# EAGLE board BOB_With_Poly.PCB (EAGLE 7.2.0)
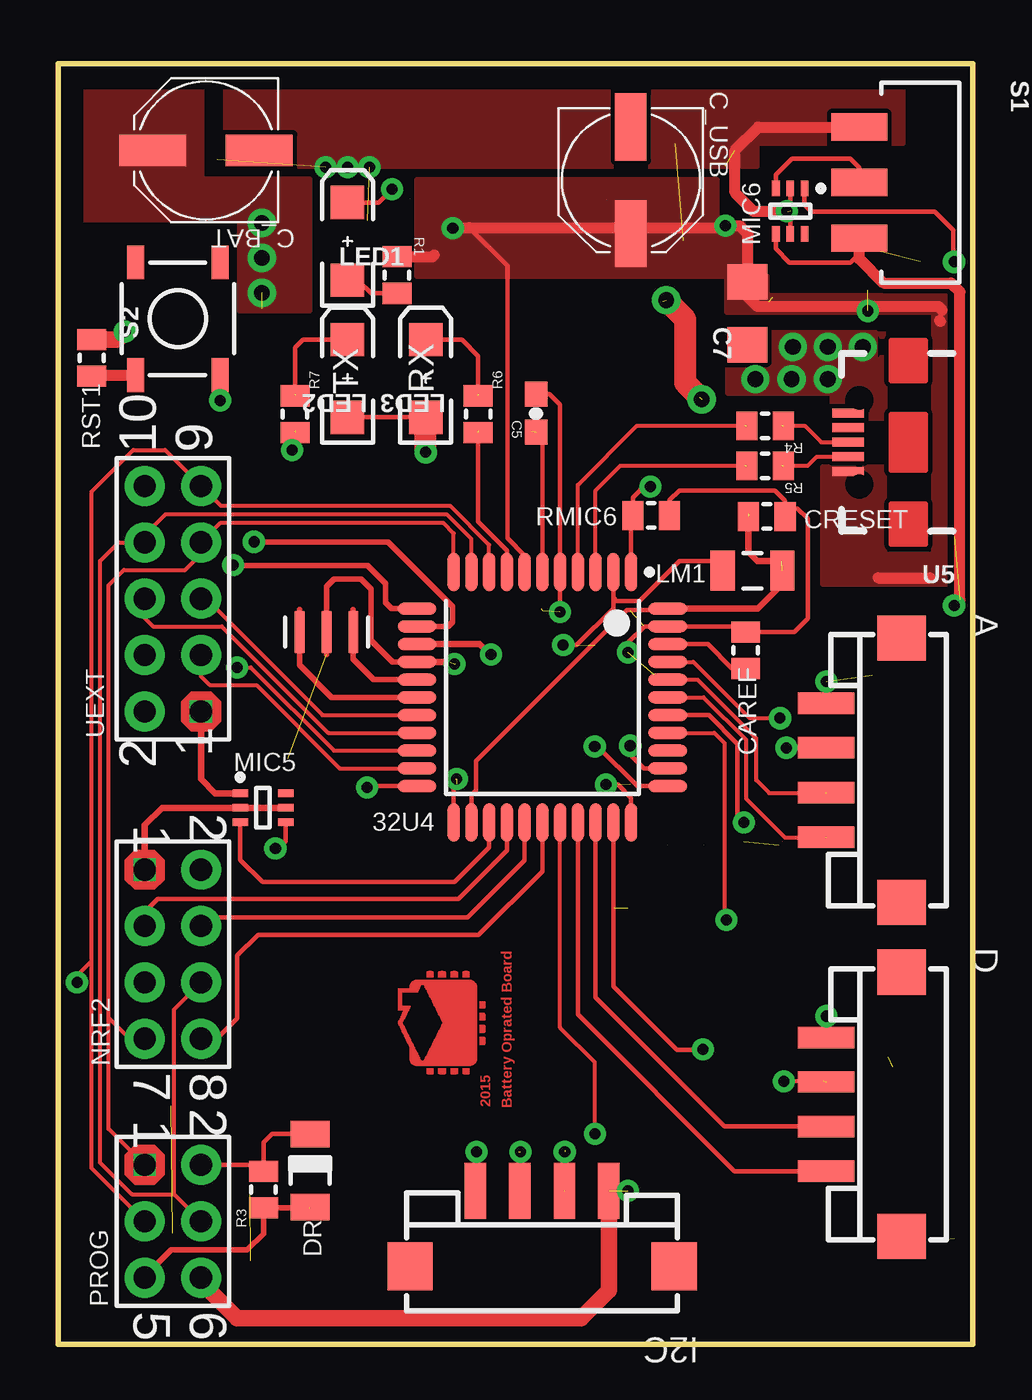
[diagram p0: board, top side]
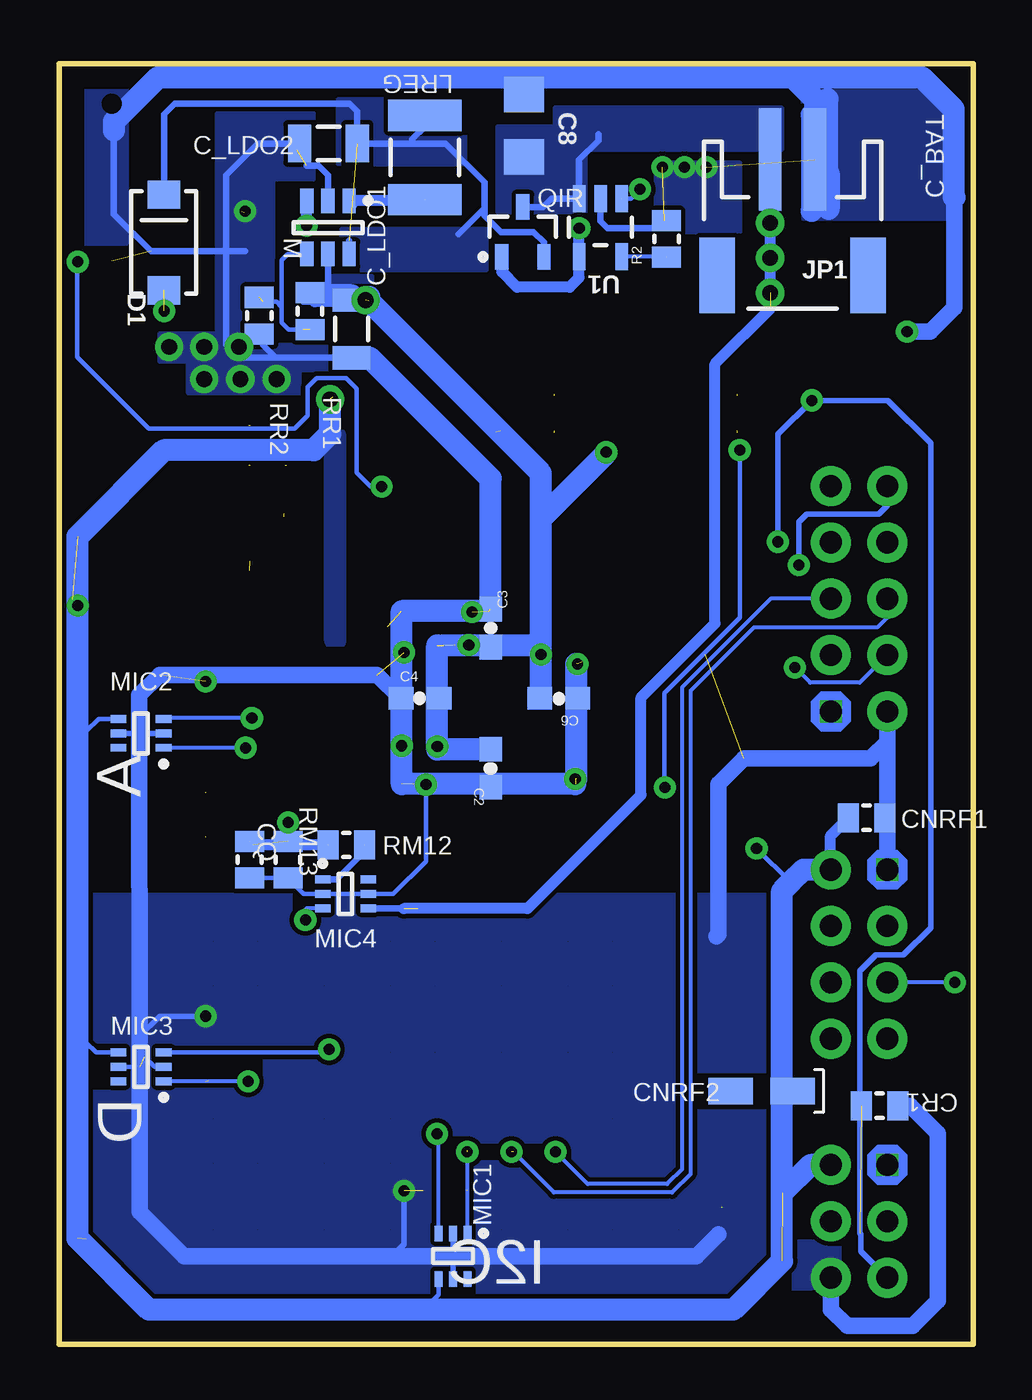
[diagram p1: board, bottom side, seen from below]

Size 41.22 x 57.73 mm. Coordinates in mm from the lower left corner, seen from the top.
Outline: 0,57.73 41.22,57.73 41.22,0 0,0 0,57.73
Copper layers (1*16): Top 0.035mm / dielectric 1.5mm / Bottom 0.035mm
Design rules "BOB_With_Poly": minimum track width 10mil, minimum drill 24mil, track to track 8mil, track to pad 8mil, pad to pad 8mil, via to via 8mil, smd to smd 8mil, copper to edge 40mil, drill to drill 8mil, minimum pad ring 0mil, minimum via ring 0mil, stop-mask expansion 4mil, vias tented up to drill 0mil, thermal gap 10mil

## Footprints (pad centres in the part's own frame; a part is rotated, then mirrored left to right if it is on the bottom)
44ML_N_1PRIMARY = smd 1.75 x 0.55: 1 -5.65,4; 2 -5.65,3.2; 3 -5.65,2.4; 4 -5.65,1.6; 5 -5.65,0.8; 6 -5.65,0; 7 -5.65,-0.8; 8 -5.65,-1.6; 9 -5.65,-2.4; 10 -5.65,-3.2; 11 -5.65,-4; 23 5.65,-4; 24 5.65,-3.2; 25 5.65,-2.4; 26 5.65,-1.6; 27 5.65,-0.8; 28 5.65,0; 29 5.65,0.8; 30 5.65,1.6; 31 5.65,2.4; 32 5.65,3.2; 33 5.65,4 | smd 0.55 x 1.75: 12 -4,-5.65; 13 -3.2,-5.65; 14 -2.4,-5.65; 15 -1.6,-5.65; 16 -0.8,-5.65; 17 0,-5.65; 18 0.8,-5.65; 19 1.6,-5.65; 20 2.4,-5.65; 21 3.2,-5.65; 22 4,-5.65; 34 4,5.65; 35 3.2,5.65; 36 2.4,5.65; 37 1.6,5.65; 38 0.8,5.65; 39 0,5.65; 40 -0.8,5.65; 41 -1.6,5.65; 42 -2.4,5.65; 43 -3.2,5.65; 44 -4,5.65
4P-SMD-2.0_2PRIMARY = smd 0.965 x 2.54: 1 -3,0; 2 -1,0; 3 1.016,0; 4 3.023,0 | smd 2.032 x 2.184: 5 -5.946,3.404; 6 5.969,3.404
0603-CAP_1PRIMARY = smd 1.118 x 1.016: 1 -0.85,0; 2 0.864,0
0603-CAP_2PRIMARY = smd 1.118 x 1.016: 1 -0.85,0; 2 0.864,0
0603-CAP_3PRIMARY = smd 1.118 x 1.016: 1 -0.85,0; 2 0.864,0
0603-CAP_4PRIMARY = smd 1.118 x 1.016: 1 -0.85,0; 2 0.864,0
0603-CAP_5PRIMARY = smd 1.118 x 1.016: 1 -0.85,0; 2 0.864,0
1206_1PRIMARY = smd 1.6 x 1.803: 1 -1.4,0; 2 1.422,0
PANASONIC_D_2PRIMARY = smd 3.023 x 1.422: 1 2.413,0; 2 -2.4,0
SMD_CAP_1206_1PRIMARY = smd 1.05 x 1.7: 1 0,0; 2 2.596,0
PANASONIC_D_1PRIMARY = smd 3.023 x 1.422: 1 2.413,0; 2 -2.4,0
SMD_CAP_0805_1PRIMARY = smd 0.95 x 1.3: 1 0,0; 2 1.65,0
CAPP_1206__3216X18L__SIZE_A_1PRIMARY = smd 1.999 x 1.199: 1 0,0; 2 2.8,0
SMA-DIODE_1PRIMARY = smd 1.27 x 1.473: 1 -2.15,0; 2 2.159,0
LL4148_1PRIMARY = smd 1.2 x 1.75: 1 -1.65,0; 2 1.65,0
4P-SMD-2.0_1PRIMARY = smd 0.965 x 2.54: 1 -3,0; 2 -1,0; 3 1.016,0; 4 3.023,0 | smd 2.032 x 2.184: 5 -5.946,3.404; 6 5.969,3.404
JST-2-SMD_1PRIMARY = smd 1.016 x 4.623: 1 -1,-3.7; 2 1.016,-3.7 | smd 1.6 x 3.404: 3 -3.4,1.524; 4 3.404,1.524
LED_SMD_1206_1PRIMARY = smd 1.5 x 1.5: 1 -1.75,0; 2 1.75,0
INDC3216_1PRIMARY = smd 1.1 x 1.8: 1 -1.35,0; 2 1.35,0
INDC4532_1PRIMARY = smd 1.4 x 3.3: 1 -1.9,0; 2 1.9,0
MCP1640_1PRIMARY = smd 1.1 x 0.6: 1 -1.2,0.95; 2 -1.2,0; 3 -1.2,-0.95; 4 1.2,-0.95; 5 1.2,0; 6 1.2,0.95
MIC94060_1PRIMARY = smd 0.7 x 0.35: 1 -1.025,0.65; 2 -1.025,0; 3 -1.025,-0.65; 4 1.025,-0.65; 5 1.025,0; 6 1.025,0.65
HDR2X4_1PRIMARY = drill 1 pad 0.889 square: 1 0,0 | drill 1 pad 1.8: 2 0,2.54; 3 2.54,0; 4 2.54,2.54; 5 5.08,0; 6 5.08,2.54; 7 7.62,0; 8 7.62,2.54
HDR2X3_1PRIMARY = drill 1 pad 0.889 square: 1 0,0 | drill 1 pad 1.8: 2 0,2.54; 3 2.54,0; 4 2.54,2.54; 5 5.08,0; 6 5.08,2.54
MICRO3_N_1PRIMARY = smd 1.15 x 0.6: 1 -1.125,0.95; 2 -1.125,-0.95; 3 1.125,0
RES_0805__2012X06L__1PRIMARY = smd 0.95 x 1.3: 1 0,0; 2 1.65,0
RES_0805__2012X06L__3PRIMARY = smd 0.95 x 1.3: 1 0,0; 2 1.65,0
RES_0805__2012X06L__2PRIMARY = smd 0.95 x 1.3: 1 0,0; 2 1.65,0
SWITCH-SPDT-SMD_1PRIMARY = drill 0.914 pad 0.914: 1 -3.55,0; 2 3.556,0 | smd 1.219 x 2.515: 3 -2.5,-2.75; 4 0,-2.75; 5 2.515,-2.75
TACTILE_SWITCH_SMD_1PRIMARY = smd 1.524 x 0.762: 1 -2.54,1.905; 2 2.54,1.905; 3 -2.54,-1.905; 4 2.54,-1.905
SOT23-5_1PRIMARY = smd 0.559 x 1.219: 1 -0.95,-1.3; 2 0,-1.3; 3 0.965,-1.3; 4 0.965,1.321; 5 -0.95,1.321
USB-AB-MICRO-SMD_V03_1PRIMARY = drill 0.864 pad 0.864: 1 2.21,-1.9; 2 2.21,1.905 | smd 1.422 x 0.406: 3 2.718,0; 4 2.718,0.66; 5 2.718,-1.3; 6 2.718,-0.65; 7 2.718,1.321
HDR2X5_1PRIMARY = drill 1 pad 0.889 square: 1 0,0 | drill 1 pad 1.8: 2 0,2.54; 3 2.54,0; 4 2.54,2.54; 5 5.08,0; 6 5.08,2.54; 7 7.62,0; 8 7.62,2.54; 9 10.16,0; 10 10.16,2.54
RESONATOR-SMD_1PRIMARY = smd 0.457 x 1.905: 1 -1.2,0; 2 0,0; 3 1.219,0

## Placement (x,y rotation side)
32U4  ATmega32U4-AU  [44ML_N_1PRIMARY]  21.82,29.16 270 top
A  [4P-SMD-2.0_2PRIMARY]  34.62,25.88 270 top
C2  .1uF  [0603-CAP_1PRIMARY]  21.77,25.96 90 bottom
C3  .1uF  [0603-CAP_2PRIMARY]  21.78,32.28 270 bottom
C4  .1uF  [0603-CAP_3PRIMARY]  24.97,29.11 0 bottom
C5  1uF  [0603-CAP_4PRIMARY]  21.54,41.96 90 top
C6  4.7uF  [0603-CAP_5PRIMARY]  18.69,29.11 180 bottom
C7  4.7uF  [1206_1PRIMARY]  31.06,46.46 90 top
C8  4.7uF  [1206_1PRIMARY]  20.27,54.94 270 bottom
C_BAT  [PANASONIC_D_2PRIMARY]  6.65,53.82 180 top
C_LDO1  4.7uF  [SMD_CAP_1206_1PRIMARY]  28.04,47.07 270 bottom
C_LDO2  4.7uF  [SMD_CAP_1206_1PRIMARY]  27.79,54.13 180 bottom
C_USB  [PANASONIC_D_1PRIMARY]  25.81,52.48 270 top
CAREF  100nF  [SMD_CAP_0805_1PRIMARY]  30.99,32.11 270 top
CNRF1  100nF  [SMD_CAP_0805_1PRIMARY]  5.64,23.72 0 bottom
CNRF2  4.7uF  [CAPP_1206__3216X18L__SIZE_A_1PRIMARY]  8.15,11.4 180 bottom
CQ  100nF  [SMD_CAP_0805_1PRIMARY]  32.64,22.66 270 bottom
CR1  4.7nF  [SMD_CAP_0805_1PRIMARY]  5.05,10.74 0 bottom
CRESET  10nF  [SMD_CAP_0805_1PRIMARY]  32.77,37.31 180 top
D  [4P-SMD-2.0_2PRIMARY]  34.62,10.82 270 top
D1  B340A  [SMA-DIODE_1PRIMARY]  36.5,49.66 90 bottom
DR  1N4148  [LL4148_1PRIMARY]  11.35,7.82 90 top
I2C  [4P-SMD-2.0_1PRIMARY]  21.82,6.91 180 top
JP1  JST-2  [JST-2-SMD_1PRIMARY]  8.15,49.71 180 bottom
LED1  RED  [LED_SMD_1206_1PRIMARY]  13.03,49.72 90 top
LED2  RED  [LED_SMD_1206_1PRIMARY]  13.03,43.54 90 top
LED3  RED  [LED_SMD_1206_1PRIMARY]  16.56,43.54 90 top
LM1  Inductor  [INDC3216_1PRIMARY]  31.29,34.87 180 top
LREG  Inductor  [INDC4532_1PRIMARY]  24.74,53.49 270 bottom
M  mcp1640  [MCP1640_1PRIMARY]  29.11,50.34 270 bottom
MIC1  MIC94060  [MIC94060_1PRIMARY]  23.47,3.96 270 bottom
MIC2  MIC94060  [MIC94060_1PRIMARY]  37.54,27.53 180 bottom
MIC3  MIC94060  [MIC94060_1PRIMARY]  37.54,12.5 180 bottom
MIC4  MIC94060  [MIC94060_1PRIMARY]  28.32,20.29 0 bottom
MIC5  MIC94060  [MIC94060_1PRIMARY]  9.22,24.18 0 top
MIC6  MIC94060  [MIC94060_1PRIMARY]  32.99,51.08 270 top
NRF2  Header_4X2  [HDR2X4_1PRIMARY]  3.89,21.39 270 top
PROG  Header_3X2  [HDR2X3_1PRIMARY]  3.89,8.08 270 top
QIR  IRLML6401  [MICRO3_N_1PRIMARY]  20.32,50.14 90 bottom
R1  330  [RES_0805__2012X06L__1PRIMARY]  15.27,49.02 270 top
R2  10k  [RES_0805__2012X06L__1PRIMARY]  13.84,49 90 bottom
R3  4.7k  [RES_0805__2012X06L__1PRIMARY]  9.25,6.15 90 top
R4  22  [RES_0805__2012X06L__1PRIMARY]  32.69,41.4 180 top
R5  22  [RES_0805__2012X06L__1PRIMARY]  32.69,39.6 180 top
R6  330  [RES_0805__2012X06L__1PRIMARY]  18.92,42.75 270 top
R7  330  [RES_0805__2012X06L__1PRIMARY]  10.67,42.75 270 top
RM12  1M  [RES_0805__2012X06L__3PRIMARY]  27.46,22.5 180 bottom
RM13  470K  [RES_0805__2012X06L__2PRIMARY]  30.91,22.66 270 bottom
RMIC6  330  [RES_0805__2012X06L__1PRIMARY]  25.91,37.36 0 top
RR1  976  [RES_0805__2012X06L__1PRIMARY]  29.92,45.75 90 bottom
RR2  562  [RES_0805__2012X06L__1PRIMARY]  32.21,45.54 90 bottom
RST1  330  [RES_0805__2012X06L__1PRIMARY]  1.5,45.29 270 top
S1  [SWITCH-SPDT-SMD_1PRIMARY]  38.86,52.37 270 top
S2  !RESET  [TACTILE_SWITCH_SMD_1PRIMARY]  5.38,46.23 90 top
U1  MCP73831  [SOT23-5_1PRIMARY]  16.81,50.35 180 bottom
U5  USB-ABCONN-11794  [USB-AB-MICRO-SMD_V03_1PRIMARY]  38.33,40.67 180 top
UEXT  Header_5X2  [HDR2X5_1PRIMARY]  6.43,28.52 90 top
Y1  8MHz  [RESONATOR-SMD_1PRIMARY]  12.09,32.11 180 top

## Library data of the parts
32U4 A C2-C8 C_BAT C_LDO1 C_LDO2 C_USB CAREF CNRF1 CNRF2 CQ CR1 CRESET D D1 DR I2C JP1 LED1-LED3 LM1 LREG M MIC1-MIC6 NRF2 PROG QIR R1-R7 RM12 RM13 RMIC6 RR1 RR2 RST1 S1 S2 U1 U5 UEXT Y1 = BOB_With_Poly

## Nets
3.3V: NRF2.2 PROG.2
5V: 32U4.7 C7.2 C_USB.1 D1.1 R1.1 U1.4 U5.7
A0: 32U4.36
A1: 32U4.37
A2: 32U4.38 CQ.1 RM12.2 RM13.1
A3: 32U4.39 A.4
A4: 32U4.40 A.3
A5: 32U4.41
CE1NRF: 32U4.26 NRF2.3
CSN1NRF: 32U4.27 NRF2.4
D0: 32U4.20 UEXT.4
D1: 32U4.21 UEXT.3
D2: 32U4.19 I2C.3 UEXT.6
D3: 32U4.18 I2C.4 UEXT.5
D5: 32U4.31 D.3
D8: 32U4.28 NRF2.8
D9: 32U4.29
D10: 32U4.30 D.4
D11: 32U4.12 UEXT.10
D13: 32U4.32
D14: 32U4.8 R6.2
D15: 32U4.9 NRF2.5 PROG.3 UEXT.9
D16: 32U4.10 NRF2.6 PROG.4 UEXT.8
D17: 32U4.11 NRF2.7 PROG.1 UEXT.7
D+: 32U4.4 R4.2
D-: 32U4.3 R5.2
GND: NRF2.1 PROG.6 S1.1 S1.2 UEXT.2 Y1.2
NET32U4_6: 32U4.6 C5.1
NET32U4_16: 32U4.16 Y1.1
NET32U4_17: 32U4.17 Y1.3
NET32U4_24: 32U4.24 32U4.44 CRESET.2 LM1.1
NET32U4_42: 32U4.42 CAREF.2
NETA_2: A.2
NETC_LDO2_1: D1.2
NETD_2: D.2
NETI2C_2: I2C.2
NETLED1_1: LED1.1 R1.2
NETLED1_2: LED1.2 U1.1
NETLED2_2: LED2.2 R7.1
NETLED3_2: LED3.2 R6.1
NETLREG_2: LREG.2 M.1
NETM_4: M.4 RR1.1 RR2.2
NETMIC4_1: RM12.1
NETR2_1: R2.1 U1.5
NETR4_1: R4.1 U5.3
NETR5_1: R5.1 U5.4
NETRST1_2: RST1.2 S2.1
RESET: 32U4.13 CR1.1 DR.1 PROG.5 R3.1 S2.3
TX_LED: 32U4.22 R7.2
UEXT_POWER: UEXT.1
V_BATT: C8.2 C_BAT.1 JP1.2 U1.3

## Tracks (layer width: path | path; a pad name or v marks a point on that pad's centre or on a via)
3.3V  (via drill 0.5 pad 1, 0.71 pad 1.27)  (7 unrouted)
  Top 0.2: 36.11,49.17 35.71,48.77 32.97,48.77 32.34,49.39 32.34,50.05 | 13.03,41.79 16.56,41.79 | v9.78,22.35 9.93,22.35 10.25,22.67 10.25,23.53 | 11.35,9.47 9.63,9.47 9.25,9.09 9.25,7.86 9.03,8.08 PROG.2 | 27.47,25.16 26.1,25.16 24.31,26.95 v24.18,26.95 | 25.02,33.66 25.17,33.5 26.19,33.5 27.99,35.31 29.92,35.31 | 25.02,33.66 25.02,34.81 | v22.76,31.52 23.37,31.52 25.02,33.17 25.02,33.66
  Top 0.3: 16.17,31.56 18.99,31.56 19.51,31.04 v19.51,31.09
  Top 0.5: v40.39,33.3 40.65,33.56 40.65,47.44 40.25,47.84 37.2,47.84 36.11,48.93 36.11,49.17 36.11,49.86
  Top 1: v16.56,40.21 16.56,41.79 | 28.91,42.7 28.27,43.33 28.27,46.2 v27.41,47.07
  Bottom 0.2: 8.26,20.8 8.26,20.83 v9.78,22.35 | 24.79,1.55 24.12,2.22 24.12,2.94 | 40.01,13.59 40.01,4.72 38.22,2.94 | 40.01,13.59 40.01,27.64 39.46,28.18 38.57,28.18 | 38.57,13.15 39.56,13.15 40.01,13.59
  Bottom 0.3: 29.11,49.14 29.11,47.57 29.4,47.28 29.69,46.99 30.23,46.99
  Bottom 0.5: 5.64,23.72 6.45,22.91 6.45,21.41 NRF2.2 | 28.04,47.07 28.12,46.99 29.69,46.99
  Bottom 1: 19.51,37.21 19.51,39.27 27.25,47.02 27.25,47.22 | v16.56,40.21 16.59,40.18 16.59,40.13 19.51,37.21 | 19.51,31.5 v19.51,31.09 19.51,29.12 | 19.51,31.5 19.51,37.21 | v29.01,42.6 29.01,41.05 29.76,40.3 36.51,40.3 40.4,36.41 40.4,4.76 37.19,1.55 24.79,1.55 10.83,1.55 8.64,3.74 8.64,20.42 8.26,20.8 7.67,21.39 NRF2.2 | 8.61,6.81 7.34,8.08 PROG.2 | 28.04,47.28 29.4,47.28 | v27.41,47.07 28.04,47.07 | 21.77,26.8 24.18,26.8 v24.18,26.95 24.18,31.5 | 19.51,31.5 23.9,31.5
  pour Bottom (no thermals): 27.15,46.51 30.66,46.51 30.66,48.13 27.15,48.13
  pour Bottom (no thermals, hatched): 28.78,40.92 28.78,36.17 28.78,31.72
5V  (via drill 0.5 pad 1)  (1 unrouted)
  Top 0.2: 18.52,50.34 20.24,48.62 20.24,36.33 21.02,35.55 32U4.7
  Top 0.5: 39.85,46.61 39.68,46.79 31.5,46.79 31.09,47.19 31.09,50.04 30.71,50.42 v30.07,50.42 | 39.73,46.15 39.78,46.1 | 16.94,49.1 16.86,49.02 R1.1 | 30.07,50.34 18.52,50.34 17.78,50.34 v17.78,50.32 | 36.96,34.54 39.29,34.54
  Bottom 0.5: v30.07,50.42 30.07,51.53 30.06,51.54 | 21.27,49.01 21.27,48.35 20.57,47.65 18.21,47.65 17.78,48.08 U1.4 v17.78,50.32
  other vias: 36.5,46.58
  pour Top (no thermals): 39.19,46.99 39.65,46.99 39.65,47.27 39.19,47.27
  pour Top (no thermals): 39.47,46.25 40.13,46.25 40.13,47.27 39.47,47.27
  pour Top (no thermals): 30.15,46.53 31.42,46.53 31.42,48.51 30.15,48.51
  pour Top (no thermals): 34.47,35.08 37.24,35.08 37.24,39.55 34.47,39.55
  pour Top (no thermals): 31.42,46.53 31.95,46.53 31.95,48.16 31.42,48.16
  pour Top (no thermals): 39.47,34.8 40.13,34.8 40.13,46.63 39.47,46.63
  pour Top (no thermals): 31.8,46.53 39.45,46.53 39.45,47.27 31.8,47.27
  pour Top (no thermals): 16.18,50.34 29.69,50.34 29.69,52.5 16.18,52.5
  pour Top (no thermals): 16.18,48.16 30.86,48.16 30.86,50.52 16.18,50.52
  pour Top (no thermals): 34.47,34.26 40.16,34.26 40.16,35.59 34.47,35.59
A1  (via drill 0.5 pad 1)
  Top 0.178: v30.12,19.13 30.05,19.2 30.05,27.08 29.57,27.56 32U4.37
  Bottom 0.178: 29.35,19.64 30.06,19.64 30.12,19.58 v30.12,19.13
A2  (via drill 0.5 pad 1)  (4 unrouted)
  Top 0.2: 32U4.38 29.33,28.36 30.62,27.07 30.62,23.81 v30.91,23.52
  Bottom 0.5: RM12.2 32.49,22.5 CQ.1 | RM13.1 v30.91,23.52
A3  (1 unrouted)
  Top 0.178: 34.6,22.83 32.77,22.83 31.01,24.59 31.01,27.23 29.08,29.16 32U4.39
A4  (1 unrouted)
  Top 0.178: 34.6,24.84 32.06,24.84 31.47,25.43 31.47,27.31 28.82,29.96 32U4.40
A5  (via drill 0.5 pad 1)
  Top 0.178: 32U4.41 28.63,30.76 31.17,28.22 v32.54,28.22
  Bottom 0.178: v32.54,28.22 36.6,28.22
CE1NRF
  Top 0.2: NRF2.3 3.89,19.48 4.47,20.07 18.03,20.07 20.22,22.25 32U4.26
CSN1NRF
  Top 0.2: NRF2.4 6.81,19.23 18.44,19.23 21.02,21.81 32U4.27
D0  (via drill 0.5 pad 1)
  Top 0.178: v8.05,30.51 8.68,30.51 12.42,26.76 32U4.20
  Bottom 0.178: UEXT.4 5.13,29.82 7.37,29.82 v8.05,30.51
D1
  Top 0.178: UEXT.3 6.43,30.1 6.81,29.72 7.72,29.72 7.72,29.71 8.93,29.71 12.68,25.96 32U4.21
D2  (via drill 0.5 pad 1)  (2 unrouted)
  Top 0.178: UEXT.6 3.89,32.74 4.27,32.36 7.36,32.36 12.16,27.56 32U4.19 | 20.75,8.66 20.75,6.91 20.78,6.88 I2C.3
  Bottom 0.178: UEXT.6 3.89,32.77 4.34,32.31 9.9,32.31 12.75,29.46 12.75,7.68 13.59,6.83 18.92,6.83 20.75,8.66
  other vias: 20.84,8.66
D3  (via drill 0.5 pad 1)
  Top 0.178: v18.85,8.66 18.8,8.61 I2C.4 | UEXT.5 6.66,33.6 11.9,28.36 32U4.18
  Bottom 0.178: v18.85,8.66 17.4,7.21 13.82,7.21 13.13,7.9 13.13,29.62 9.14,33.6 UEXT.5
D4
  Top 0.2: 8.2,23.53 8.2,21.83 9.2,20.83 17.86,20.83 19.42,22.39 19.42,23.51
D5
  Top 0.2: 32U4.31 24.22,15.62 30.03,9.8 D.3
D7  (via drill 0.5 pad 1)
  Top 0.2: 33.64,52.1 33.64,51.37 33.96,51.05 39.52,51.05 40.36,50.22 40.36,48.74 40.39,48.77 v40.39,48.79 | 25.82,34.81 25.82,37.37 25.91,37.46 25.91,38.18 26.54,38.81 v26.7,38.66
  Bottom 0.2: v26.7,38.66 27.18,38.66 27.81,39.29 27.81,43.08 28.3,43.56 29.62,43.56 30.02,43.15 30.02,41.86 30.61,41.27 37.19,41.27 40.41,44.5 40.41,48.82 v40.39,48.79
D8
  Top 0.2: NRF2.8 7.14,13.77 8.06,14.69 8.06,17.51 9,18.44 18.95,18.44 21.82,21.31 32U4.28
D9  (via drill 0.5 pad 1)
  Top 0.178: 32U4.29 22.62,14.26 24.19,12.7 v24.19,9.47
  Bottom 0.178: 24.12,4.99 24.12,9.41 v24.19,9.47
D10
  Top 0.2: 32U4.30 23.42,14.86 30.48,7.8 D.4
D11  (via drill 0.5 pad 1)
  Top 0.254: v7.87,35.13 7.9,35.1 13.94,35.1 14.76,34.29 14.76,33.43 15.02,33.16 32U4.12
  Bottom 0.254: v7.87,35.13 7.87,37.06 7.52,37.41 4.27,37.41 3.89,37.8 UEXT.10
D13  (via drill 0.5 pad 1)
  Top 0.2: 32U4.32 25.02,16.13 27.89,13.26 29.03,13.26 v29.06,13.28
  Bottom 0.2: 36.52,13.15 29.2,13.15 v29.06,13.28
D14  (1 unrouted)
  Top 0.2: 18.92,41.19 18.92,37.08 20.22,35.78 32U4.8
D15  (via drill 0.5 pad 1)
  Top 0.178: 1.5,17.27 1.5,7.92 PROG.3 | 1.5,17.27 1.5,38.43 3.38,40.31 4.8,40.31 UEXT.9 7.32,37.8 17.65,37.8 19.42,36.03 32U4.9 | v0.84,16.31 0.53,16.31 1.5,17.27
  Bottom 0.178: v0.84,16.31 NRF2.5
D16
  Top 0.178: 32U4.10 18.62,36.29 17.5,37.41 4.83,37.41 3.89,36.47 UEXT.8 2.72,36.14 1.88,35.31 1.88,8.18 3.3,6.76 5.21,6.76 | 5.21,6.76 PROG.4 | NRF2.6 5.21,15.09 5.21,6.76
D17
  Top 0.178: 32U4.11 17.82,36.55 17.34,37.03 7.32,37.03 UEXT.7 6.43,35.61 5.72,34.9 2.95,34.9 2.26,34.21 2.26,14.71 | PROG.1 2.26,9.7 2.26,14.71 | 2.26,14.71 3.2,13.77 NRF2.7
D+  (1 unrouted)
  Top 0.178: 32U4.4 23.42,38.73 26.09,41.4 30.96,41.4
D-  (1 unrouted)
  Top 0.178: 32U4.3 24.22,38.48 25.34,39.6 30.96,39.6
GND  (via drill 0.5 pad 1, 0.71 pad 1.27)  (18 unrouted)
  Top 0.2: 32.99,50.05 32.99,51.08 | v32.84,51.08 32.99,51.23 32.99,52.1 | 32.54,37.67 32.77,37.67 | 32.77,37.67 33.33,37.67 33.78,37.21 33.78,32.72 33.17,32.11 30.99,32.11 30.73,32.36 26.42,32.36 25.68,31.62 v25.68,31.19 | 32.77,37.67 32.77,38.02 32.31,38.48 27.99,38.48 27.56,38.05 27.56,37.36 | 32.77,37.31 32.77,37.67 | v22.62,33.01 22.62,42.35 22.15,42.83 21.54,42.83 | v17.96,25.48 17.82,25.62 17.82,23.51 | 25.82,23.51 25.82,24.63 25.22,25.22 v24.69,25.22 | 27.47,25.96 26.39,25.96 25.78,26.57 v25.78,26.97
  Top 0.254: 34.62,28.88 v34.62,29.87 | 12.09,33.12 12.09,34.16 12.42,34.49 13.64,34.49 14.1,34.04 14.1,31.72 15.06,30.76 16.17,30.76
  Top 0.3: NRF2.1 3.89,23.39 4.67,24.18 10.25,24.18 | 16.17,30.76 17.65,30.76
  Top 0.5: 36.11,54.87 31.56,54.87 30.51,53.82 30.51,51.92 31.35,51.08 v32.84,51.08
  Top 0.75: v3,45.64 2.64,45.29 1.5,45.29 | 24.82,6.91 24.82,2.42 23.57,1.17 8.05,1.17 6.43,2.79 PROG.6
  Bottom 0.2: v32.84,51.08 32.89,51.03 | 37.59,12.5 38.57,12.5 | 37.39,13.28 37.39,12.95 36.93,12.5 36.52,12.5 | v24.69,25.22 24.69,21.77 26.16,20.29 30.2,20.29 30.91,21.01 32.64,21.01
  Bottom 0.254: 26.21,3.96 25.68,4.5 v25.68,6.91 | 37.59,13.89 36.7,14.78 v34.62,14.78 | 37.62,27.2 37.29,27.53 36.52,27.53 | 23.47,2.94 23.47,3.73 23.7,3.96 23.47,4.19 23.47,4.99 | 37.62,27.53 38.57,27.53
  Bottom 0.3: 16.82,51.65 16.82,50.62 16.51,50.32 14.26,50.32 13.93,50.65 | 13.6,50.32 13.93,50.65 | 13.84,50.65 13.93,50.65 | 28.04,44.47 31.47,44.47 | 31.47,44.47 32.03,45.03 32.03,45.75 | 31.47,44.47 33.12,44.47 33.71,45.06 33.71,49.28 | 30.38,54.13 32.28,54.13 33.71,52.7 33.71,49.28 | 29.11,51.54 29.11,52.7 29.54,53.14 30.07,53.14 | 7.15,53.41 7.15,56.23 | 38.76,54.71 38.76,50.95 37.08,49.28 33.71,49.28 | 32.84,49.28 33.71,49.28
  Bottom 0.75: 0.86,51.69 0.86,46.74 1.96,45.64 v3,45.64 | 3.4,10.74 2.85,10.74 1.6,9.5 1.6,1.96 2.74,0.81 5.7,0.81 6.43,1.54 PROG.6 | 25.82,29.11 26.89,30.18 36.7,30.18 37.62,29.26 37.62,27.53 37.62,27.2 37.59,13.89 37.59,12.5 37.59,5.97 35.59,3.96 26.21,3.96 23.7,3.96 12.5,3.96 11.51,4.95 | 11.58,18.39 11.51,18.47 11.51,25.25 10.36,26.39 4.65,26.39 3.89,27.15 | NRF2.1 3.89,27.15 | 3.89,27.15 UEXT.2
  Bottom 1: 21.78,33.13 21.78,39.02 27.22,44.47 28.04,44.47 | 17.91,25.48 17.91,30.68 | 21.84,33.05 25.78,33.05 v25.78,26.97 25.78,25.25 17.96,25.25 | 8.13,57.1 7.14,56.11 7.14,55.42 7.09,55.37 7.09,53.47 7.15,53.41 6.53,52.78 6.53,51.18 6.58,51.23 6.58,56.13 7.29,55.42 7.29,51.08 | 8.13,57.1 36.78,57.1 38.76,55.12 38.76,54.71 | 0.86,51.69 0.89,51.71 0.89,55.68 2.31,57.1 8.13,57.1
  other vias: 14.02,53.06 13.03,53.06 12.04,53.06 31.42,43.51 33.12,44.96 33.06,43.51 34.7,43.51 36.27,44.96 34.7,44.96 17.86,30.66
  pour Top (no thermals): 31.5,54.15 38.07,54.15 38.07,57 31.5,57
  pour Top (no thermals): 7.54,53.11 31.5,53.11 31.5,57 7.54,57
  pour Top (no thermals): 36.12,41.76 37.26,41.76 37.26,41.88 36.12,41.88
  pour Top (no thermals): 35.51,43.1 36.83,43.1 36.83,45.59 35.51,45.59
  pour Top (no thermals): 34.9,41.78 35.51,41.78 35.51,43.43 34.9,43.43
  pour Top (no thermals): 30.18,42.88 35.51,42.88 35.51,45.59 30.18,45.59
  pour Bottom (no thermals): 34.09,44.32 36.68,44.32 36.68,45.54 34.09,45.54
  pour Bottom (no thermals): 30.4,42.9 35.38,42.9 35.38,44.45 30.4,44.45
  pour Bottom (no thermals): 10.57,50.16 14.3,50.16 14.3,53.24 10.57,53.24
  pour Bottom (no thermals): 29.77,52.55 33.86,52.55 33.86,55.47 29.77,55.47
  pour Bottom (no thermals): 31.6,47.93 33.66,47.93 33.66,52.73 31.6,52.73
  pour Bottom (no thermals): 0.46,50.76 7.67,50.76 7.67,57.23 0.46,57.23
  pour Bottom (no thermals): 38.2,49.63 40.74,49.63 40.74,57.23 38.2,57.23
  pour Bottom (no thermals): 33.1,44.32 34.09,44.32 34.09,55.47 33.1,55.47
  pour Bottom (no thermals): 31.55,44.35 33.32,44.35 33.32,46.05 31.55,46.05
  pour Bottom (no thermals): 27.18,43.94 34.09,43.94 34.09,45.01 27.18,45.01
  pour Bottom (no thermals, hatched): 6.43,19.85 23.28,19.85 40.54,19.85 40.82,0.28 40.72,0.18 40.54,0.36 6.43,3
NET32U4_6  (1 unrouted)
  Top 0.2: 21.32,41.17 21.82,40.68 32U4.6
NET32U4_16
  Top 0.254: 32U4.16 14.21,29.96 13.29,30.88 13.29,31.09 Y1.1
NET32U4_17
  Top 0.254: 32U4.17 12.32,29.16 10.87,30.61 10.87,31.09 Y1.3
NET32U4_24  (2 unrouted)
  Top 0.2: 32U4.44 27.47,33.1 25.63,33.1 18.82,26.29 18.82,24.97 18.62,24.77 32U4.24
  Top 0.3: 30.89,37.67 31.12,37.44 31.12,35.71 31.52,35.31 32.62,35.31 32.62,34.24 31.53,33.16 32U4.44
NET32U4_42
  Top 0.2: 32U4.42 29.27,31.56 30.38,30.46 CAREF.2
NETA_2  (via drill 0.5 pad 1)
  Top 0.178: v32.83,26.88 A.2
  Bottom 0.178: v32.83,26.88 36.52,26.88
NETC_LDO2_1  (1 unrouted)
  Bottom 0.3: D1.2 36.5,55.45 36.02,55.93 28.14,55.93 27.79,55.58 27.79,54.13 23.8,54.13 22.05,52.37 22.05,51.21 | 19.37,49.01 19.37,49.67 19.84,50.14 21.31,50.14 22.05,50.88 22.05,51.21 | 24.74,55.39 24.74,54.89 25.31,54.32 | 28.16,49.14 28.16,49.74 | 22.05,51.21 23.22,50.04
  pour Bottom (no thermals): 22.96,53.21 28.63,53.21 28.63,56.11 22.96,56.11
  pour Bottom (no thermals): 21.97,48.44 28.47,48.44 28.47,50.24 21.97,50.24
NETD_2  (via drill 0.5 pad 1)  (1 unrouted)
  Top 0.178: v32.71,11.85 32.73,11.87 34.49,11.87
  Bottom 0.178: v32.71,11.85 36.36,11.85
NETI2C_2  (via drill 0.5 pad 1)  (3 unrouted)
  Top 0.178: I2C.2 22.83,8.74
  Bottom 0.178: 22.83,8.74 22.82,8.75 22.82,4.99
  other vias: 22.83,8.66
NETLED1_1
  Top 0.2: R1.2 14.1,47.37 13.5,47.97 LED1.1
NETLED1_2  (via drill 0.5 pad 1)  (1 unrouted)
  Top 0.2: LED1.2 14.44,51.47 v15.04,52.07 15.42,52.07
  Bottom 0.2: v15.04,52.07 15.46,51.65 U1.1
NETLED2_2  (1 unrouted)
  Top 0.2: 10.67,42.84 10.67,44.93 11.02,45.29 LED2.2
NETLED3_2  (1 unrouted)
  Top 0.2: LED3.2 18.19,45.29 18.92,44.55 18.92,42.84
NETLREG_2  (1 unrouted)
  Bottom 0.5: 28.02,51.4 M.1 24.79,51.54 LREG.2
NETM_4  (2 unrouted)
  Bottom 0.2: 30.23,45.75 30.89,45.75 31.19,46.05 31.19,46.76 | M.4 30.92,49.14 31.19,48.87 31.19,46.76 | 31.19,46.76 31.42,46.99 32.03,46.99
NETMIC4_1  (1 unrouted)
  Bottom 0.3: 29.35,20.94 28.71,20.94 27.46,22.2 RM12.1
NETMIC6_3
  Top 0.2: 36.11,52.37 36.11,53.04 35.71,53.44 33.07,53.44 32.34,52.72 32.34,52.1
NETR2_1  (1 unrouted)
  Bottom 0.178: U1.5 13.88,49.03 R2.1
NETR4_1  (1 unrouted)
  Top 0.178: 32.61,41.4 33.66,41.4 34.39,40.67 U5.3
NETR5_1  (1 unrouted)
  Top 0.178: U5.4 34.19,40 33.78,39.6 32.61,39.6
NETRST1_2
  Top 0.5: RST1.2 1.55,43.69 S2.1
RESET  (via drill 0.5 pad 1)  (2 unrouted)
  Top 0.254: PROG.5 3.89,3.05 5.08,4.24 8.51,4.24 9.25,4.98 R3.1 11.33,6.15 | v7.29,42.54 S2.3 | v8.81,36.17 14.86,36.17 17.78,33.25 17.78,32.56 17.58,32.36 32U4.13
  Bottom 0.254: v8.81,36.17 8.81,41.02 v7.29,42.54 3.86,42.54 1.93,40.61 1.93,18.77 3.16,17.54 4.4,17.54 5.12,16.82 5.12,4.99 5.08,4.95 5.08,4.19 PROG.5
S$1
  Top 0.025: 19.25,15.18 19.25,15.43
S$2
  Top 0.025: 19.25,14.62 19.25,14.87
S$3
  Top 0.025: 19.25,14.08 19.25,14.34
S$4
  Top 0.025: 19.25,13.55 19.25,13.8
S$5
  Top 0.025: 19.23,15.13 19.23,15.46
S$6
  Top 0.025: 19.23,14.59 19.23,14.9
S$7
  Top 0.025: 19.23,14.06 19.23,14.36
S$8
  Top 0.025: 19.23,13.5 19.23,13.83
S$9
  Top 0.025: 19.2,15.13 19.2,15.46
S$10
  Top 0.025: 19.2,14.59 19.2,14.92
S$11
  Top 0.025: 19.2,14.03 19.2,14.39
S$12
  Top 0.025: 19.2,13.5 19.2,13.86
S$13
  Top 0.025: 19.18,15.13 19.18,15.46
S$14
  Top 0.025: 19.18,14.59 19.18,14.92
S$15
  Top 0.025: 19.18,14.03 19.18,14.39
S$16
  Top 0.025: 19.18,13.5 19.18,13.86
S$17
  Top 0.025: 19.15,15.13 19.15,15.46
S$18
  Top 0.025: 19.15,14.59 19.15,14.92
S$19
  Top 0.025: 19.15,14.03 19.15,14.39
S$20
  Top 0.025: 19.15,13.5 19.15,13.86
S$21
  Top 0.025: 19.13,15.13 19.13,15.46
S$22
  Top 0.025: 19.13,14.59 19.13,14.92
S$23
  Top 0.025: 19.13,14.03 19.13,14.39
S$24
  Top 0.025: 19.13,13.5 19.13,13.86
S$25
  Top 0.025: 19.1,15.13 19.1,15.46
S$26
  Top 0.025: 19.1,14.59 19.1,14.92
S$27
  Top 0.025: 19.1,14.03 19.1,14.39
S$28
  Top 0.025: 19.1,13.5 19.1,13.86
S$29
  Top 0.025: 19.08,15.13 19.08,15.46
S$30
  Top 0.025: 19.08,14.59 19.08,14.92
S$31
  Top 0.025: 19.08,14.03 19.08,14.39
S$32
  Top 0.025: 19.08,13.5 19.08,13.86
S$33
  Top 0.025: 19.05,15.13 19.05,15.46
S$34
  Top 0.025: 19.05,14.59 19.05,14.92
S$35
  Top 0.025: 19.05,14.03 19.05,14.39
S$36
  Top 0.025: 19.05,13.5 19.05,13.86
S$37
  Top 0.025: 19.02,15.13 19.02,15.46
S$38
  Top 0.025: 19.02,14.59 19.02,14.92
S$39
  Top 0.025: 19.02,14.03 19.02,14.39
S$40
  Top 0.025: 19.02,13.5 19.02,13.86
S$41
  Top 0.025: 19,15.13 19,15.46
S$42
  Top 0.025: 19,14.59 19,14.92
S$43
  Top 0.025: 19,14.03 19,14.39
S$44
  Top 0.025: 19,13.5 19,13.86
S$45
  Top 0.025: 18.87,12.79 18.87,16.17
S$46
  Top 0.025: 18.85,12.74 18.85,16.24
S$47
  Top 0.025: 18.82,12.69 18.82,16.27
S$48
  Top 0.025: 18.8,12.66 18.8,16.29
S$49
  Top 0.025: 18.77,12.64 18.77,16.32
S$50
  Top 0.025: 18.75,12.61 18.75,16.34
S$51
  Top 0.025: 18.72,12.59 18.72,16.37
S$52
  Top 0.025: 18.69,12.59 18.69,16.37
S$53
  Top 0.025: 18.67,12.56 18.67,16.4
S$54
  Top 0.025: 18.64,12.56 18.64,16.4
S$55
  Top 0.025: 18.62,12.56 18.62,16.42
S$56
  Top 0.025: 18.59,12.53 18.59,16.42
S$57
  Top 0.025: 18.57,12.53 18.57,16.42
S$58
  Top 0.025: 18.54,16.52 18.54,16.78
S$59
  Top 0.025: 18.54,12.53 18.54,16.42
S$60
  Top 0.025: 18.54,12.18 18.54,12.43
S$61
  Top 0.025: 18.52,16.52 18.52,16.8
S$62
  Top 0.025: 18.52,12.53 18.52,16.42
S$63
  Top 0.025: 18.52,12.15 18.52,12.43
S$64
  Top 0.025: 18.49,16.52 18.49,16.8
S$65
  Top 0.025: 18.49,12.53 18.49,16.42
S$66
  Top 0.025: 18.49,12.15 18.49,12.43
S$67
  Top 0.025: 18.47,16.52 18.47,16.8
S$68
  Top 0.025: 18.47,12.53 18.47,16.42
S$69
  Top 0.025: 18.47,12.15 18.47,12.43
S$70
  Top 0.025: 18.44,16.52 18.44,16.83
S$71
  Top 0.025: 18.44,12.53 18.44,16.42
S$72
  Top 0.025: 18.44,12.15 18.44,12.43
S$73
  Top 0.025: 18.42,16.52 18.42,16.83
S$74
  Top 0.025: 18.42,12.53 18.42,16.42
S$75
  Top 0.025: 18.42,12.15 18.42,12.43
S$76
  Top 0.025: 18.39,16.52 18.39,16.83
S$77
  Top 0.025: 18.39,12.53 18.39,16.42
S$78
  Top 0.025: 18.39,12.15 18.39,12.43
S$79
  Top 0.025: 18.36,16.52 18.36,16.83
S$80
  Top 0.025: 18.36,12.53 18.36,16.42
S$81
  Top 0.025: 18.36,12.15 18.36,12.43
S$82
  Top 0.025: 18.34,16.52 18.34,16.83
S$83
  Top 0.025: 18.34,12.53 18.34,16.42
S$84
  Top 0.025: 18.34,12.15 18.34,12.43
S$85
  Top 0.025: 18.31,16.52 18.31,16.8
S$86
  Top 0.025: 18.31,12.53 18.31,16.42
S$87
  Top 0.025: 18.31,12.15 18.31,12.43
S$88
  Top 0.025: 18.29,16.52 18.29,16.8
S$89
  Top 0.025: 18.29,12.53 18.29,16.42
S$90
  Top 0.025: 18.29,12.15 18.29,12.43
S$91
  Top 0.025: 18.26,16.52 18.26,16.8
S$92
  Top 0.025: 18.26,12.53 18.26,16.42
S$93
  Top 0.025: 18.26,12.18 18.26,12.43
S$94
  Top 0.025: 18.24,16.52 18.24,16.78
S$95
  Top 0.025: 18.24,12.53 18.24,16.42
S$96
  Top 0.025: 18.24,12.18 18.24,12.43
S$97
  Top 0.025: 18.21,12.53 18.21,16.42
S$98
  Top 0.025: 18.19,12.53 18.19,16.42
S$99
  Top 0.025: 18.16,12.53 18.16,16.42
S$100
  Top 0.025: 18.14,12.53 18.14,16.42
S$101
  Top 0.025: 18.11,12.53 18.11,16.42
S$102
  Top 0.025: 18.09,12.53 18.09,16.42
S$103
  Top 0.025: 18.06,12.53 18.06,16.42
S$104
  Top 0.025: 18.03,12.53 18.03,16.42
S$105
  Top 0.025: 18.01,16.52 18.01,16.78
S$106
  Top 0.025: 18.01,12.53 18.01,16.42
S$107
  Top 0.025: 18.01,12.18 18.01,12.43
S$108
  Top 0.025: 17.98,16.52 17.98,16.8
S$109
  Top 0.025: 17.98,12.53 17.98,16.42
S$110
  Top 0.025: 17.98,12.18 17.98,12.43
S$111
  Top 0.025: 17.96,16.52 17.96,16.8
S$112
  Top 0.025: 17.96,12.53 17.96,16.42
S$113
  Top 0.025: 17.96,12.15 17.96,12.43
S$114
  Top 0.025: 17.93,16.52 17.93,16.8
S$115
  Top 0.025: 17.93,12.53 17.93,16.42
S$116
  Top 0.025: 17.93,12.15 17.93,12.43
S$117
  Top 0.025: 17.91,16.52 17.91,16.83
S$118
  Top 0.025: 17.91,12.53 17.91,16.42
S$119
  Top 0.025: 17.91,12.15 17.91,12.43
S$120
  Top 0.025: 17.88,16.52 17.88,16.83
S$121
  Top 0.025: 17.88,12.53 17.88,16.42
S$122
  Top 0.025: 17.88,12.15 17.88,12.43
S$123
  Top 0.025: 17.86,16.52 17.86,16.83
S$124
  Top 0.025: 17.86,12.53 17.86,16.42
S$125
  Top 0.025: 17.86,12.15 17.86,12.43
S$126
  Top 0.025: 17.83,16.52 17.83,16.83
S$127
  Top 0.025: 17.83,12.53 17.83,16.42
S$128
  Top 0.025: 17.83,12.15 17.83,12.43
S$129
  Top 0.025: 17.81,16.52 17.81,16.83
S$130
  Top 0.025: 17.81,12.53 17.81,16.42
S$131
  Top 0.025: 17.81,12.15 17.81,12.43
S$132
  Top 0.025: 17.78,16.52 17.78,16.8
S$133
  Top 0.025: 17.78,12.53 17.78,16.42
S$134
  Top 0.025: 17.78,12.15 17.78,12.43
S$135
  Top 0.025: 17.75,16.52 17.75,16.8
S$136
  Top 0.025: 17.75,12.53 17.75,16.42
S$137
  Top 0.025: 17.75,12.15 17.75,12.43
S$138
  Top 0.025: 17.73,16.52 17.73,16.8
S$139
  Top 0.025: 17.73,12.53 17.73,16.42
S$140
  Top 0.025: 17.73,12.15 17.73,12.43
S$141
  Top 0.025: 17.7,16.52 17.7,16.78
S$142
  Top 0.025: 17.7,12.53 17.7,16.42
S$143
  Top 0.025: 17.7,12.18 17.7,12.43
S$144
  Top 0.025: 17.68,12.53 17.68,16.42
S$145
  Top 0.025: 17.65,12.53 17.65,16.42
S$146
  Top 0.025: 17.63,12.53 17.63,16.42
S$147
  Top 0.025: 17.6,12.53 17.6,16.42
S$148
  Top 0.025: 17.58,12.53 17.58,16.42
S$149
  Top 0.025: 17.55,12.53 17.55,16.42
S$150
  Top 0.025: 17.53,12.53 17.53,16.42
S$151
  Top 0.025: 17.5,12.53 17.5,16.42
S$152
  Top 0.025: 17.48,16.52 17.48,16.75
S$153
  Top 0.025: 17.48,12.53 17.48,16.42
S$154
  Top 0.025: 17.48,12.2 17.48,12.43
S$155
  Top 0.025: 17.45,16.52 17.45,16.8
S$156
  Top 0.025: 17.45,12.53 17.45,16.42
S$157
  Top 0.025: 17.45,12.18 17.45,12.43
S$158
  Top 0.025: 17.42,16.52 17.42,16.8
S$159
  Top 0.025: 17.42,12.53 17.42,16.42
S$160
  Top 0.025: 17.42,12.15 17.42,12.43
S$161
  Top 0.025: 17.4,16.52 17.4,16.8
S$162
  Top 0.025: 17.4,12.53 17.4,16.42
S$163
  Top 0.025: 17.4,12.15 17.4,12.43
S$164
  Top 0.025: 17.37,16.52 17.37,16.8
S$165
  Top 0.025: 17.37,12.53 17.37,16.42
S$166
  Top 0.025: 17.37,12.15 17.37,12.43
S$167
  Top 0.025: 17.35,16.52 17.35,16.83
S$168
  Top 0.025: 17.35,12.53 17.35,16.42
S$169
  Top 0.025: 17.35,12.15 17.35,12.43
S$170
  Top 0.025: 17.32,16.52 17.32,16.83
S$171
  Top 0.025: 17.32,14.52 17.32,16.42
S$172
  Top 0.025: 17.32,12.53 17.32,14.44
S$173
  Top 0.025: 17.32,12.15 17.32,12.43
S$174
  Top 0.025: 17.3,16.52 17.3,16.83
S$175
  Top 0.025: 17.3,14.57 17.3,16.42
S$176
  Top 0.025: 17.3,12.53 17.3,14.41
S$177
  Top 0.025: 17.3,12.15 17.3,12.43
S$178
  Top 0.025: 17.27,16.52 17.27,16.83
S$179
  Top 0.025: 17.27,14.62 17.27,16.42
S$180
  Top 0.025: 17.27,12.53 17.27,14.34
S$181
  Top 0.025: 17.27,12.15 17.27,12.43
S$182
  Top 0.025: 17.25,16.52 17.25,16.8
S$183
  Top 0.025: 17.25,14.67 17.25,16.42
S$184
  Top 0.025: 17.25,12.53 17.25,14.29
S$185
  Top 0.025: 17.25,12.15 17.25,12.43
S$186
  Top 0.025: 17.22,16.52 17.22,16.8
S$187
  Top 0.025: 17.22,14.72 17.22,16.42
S$188
  Top 0.025: 17.22,12.53 17.22,14.24
S$189
  Top 0.025: 17.22,12.15 17.22,12.43
S$190
  Top 0.025: 17.2,16.52 17.2,16.8
S$191
  Top 0.025: 17.2,14.77 17.2,16.42
S$192
  Top 0.025: 17.2,12.53 17.2,14.19
S$193
  Top 0.025: 17.2,12.15 17.2,12.43
S$194
  Top 0.025: 17.17,16.52 17.17,16.8
S$195
  Top 0.025: 17.17,14.82 17.17,16.42
S$196
  Top 0.025: 17.17,12.53 17.17,14.13
S$197
  Top 0.025: 17.17,12.18 17.17,12.43
S$198
  Top 0.025: 17.15,16.52 17.15,16.75
S$199
  Top 0.025: 17.15,14.87 17.15,16.42
S$200
  Top 0.025: 17.15,12.53 17.15,14.08
S$201
  Top 0.025: 17.15,12.2 17.15,12.43
S$202
  Top 0.025: 17.12,14.92 17.12,16.42
S$203
  Top 0.025: 17.12,12.53 17.12,14.03
S$204
  Top 0.025: 17.09,14.97 17.09,16.42
S$205
  Top 0.025: 17.09,12.53 17.09,13.98
S$206
  Top 0.025: 17.07,15.02 17.07,16.42
S$207
  Top 0.025: 17.07,12.53 17.07,13.93
S$208
  Top 0.025: 17.04,15.07 17.04,16.42
S$209
  Top 0.025: 17.04,12.53 17.04,13.88
S$210
  Top 0.025: 17.02,15.13 17.02,16.42
S$211
  Top 0.025: 17.02,12.53 17.02,13.83
S$212
  Top 0.025: 16.99,15.18 16.99,16.42
S$213
  Top 0.025: 16.99,12.53 16.99,13.78
S$214
  Top 0.025: 16.97,15.23 16.97,16.42
S$215
  Top 0.025: 16.97,12.53 16.97,13.73
S$216
  Top 0.025: 16.94,15.28 16.94,16.42
S$217
  Top 0.025: 16.94,12.53 16.94,13.68
S$218
  Top 0.025: 16.92,16.52 16.92,16.78
S$219
  Top 0.025: 16.92,15.33 16.92,16.42
S$220
  Top 0.025: 16.92,12.53 16.92,13.63
S$221
  Top 0.025: 16.92,12.18 16.92,12.43
S$222
  Top 0.025: 16.89,16.52 16.89,16.8
S$223
  Top 0.025: 16.89,15.38 16.89,16.42
S$224
  Top 0.025: 16.89,12.53 16.89,13.58
S$225
  Top 0.025: 16.89,12.15 16.89,12.43
S$226
  Top 0.025: 16.87,16.52 16.87,16.8
S$227
  Top 0.025: 16.87,15.43 16.87,16.42
S$228
  Top 0.025: 16.87,12.53 16.87,13.53
S$229
  Top 0.025: 16.87,12.15 16.87,12.43
S$230
  Top 0.025: 16.84,16.52 16.84,16.8
S$231
  Top 0.025: 16.84,15.51 16.84,16.42
S$232
  Top 0.025: 16.84,12.53 16.84,13.47
S$233
  Top 0.025: 16.84,12.15 16.84,12.43
S$234
  Top 0.025: 16.82,16.52 16.82,16.83
S$235
  Top 0.025: 16.82,15.53 16.82,16.42
S$236
  Top 0.025: 16.82,12.53 16.82,13.42
S$237
  Top 0.025: 16.82,12.15 16.82,12.43
S$238
  Top 0.025: 16.79,16.52 16.79,16.83
S$239
  Top 0.025: 16.79,15.58 16.79,16.42
S$240
  Top 0.025: 16.79,12.53 16.79,13.37
S$241
  Top 0.025: 16.79,12.15 16.79,12.43
S$242
  Top 0.025: 16.76,16.52 16.76,16.83
S$243
  Top 0.025: 16.76,15.63 16.76,16.42
S$244
  Top 0.025: 16.76,12.53 16.76,13.32
S$245
  Top 0.025: 16.76,12.15 16.76,12.43
S$246
  Top 0.025: 16.74,16.52 16.74,16.83
S$247
  Top 0.025: 16.74,15.68 16.74,16.42
S$248
  Top 0.025: 16.74,12.53 16.74,13.27
S$249
  Top 0.025: 16.74,12.15 16.74,12.43
S$250
  Top 0.025: 16.71,16.52 16.71,16.83
S$251
  Top 0.025: 16.71,15.74 16.71,16.42
S$252
  Top 0.025: 16.71,12.53 16.71,13.22
S$253
  Top 0.025: 16.71,12.15 16.71,12.43
S$254
  Top 0.025: 16.69,16.52 16.69,16.8
S$255
  Top 0.025: 16.69,15.79 16.69,16.42
S$256
  Top 0.025: 16.69,12.53 16.69,13.17
S$257
  Top 0.025: 16.69,12.15 16.69,12.43
S$258
  Top 0.025: 16.66,16.52 16.66,16.8
S$259
  Top 0.025: 16.66,15.84 16.66,16.42
S$260
  Top 0.025: 16.66,12.53 16.66,13.12
S$261
  Top 0.025: 16.66,12.15 16.66,12.43
S$262
  Top 0.025: 16.64,16.52 16.64,16.8
S$263
  Top 0.025: 16.64,15.89 16.64,16.42
S$264
  Top 0.025: 16.64,12.53 16.64,13.07
S$265
  Top 0.025: 16.64,12.18 16.64,12.43
S$266
  Top 0.025: 16.61,16.52 16.61,16.78
S$267
  Top 0.025: 16.61,15.96 16.61,16.42
S$268
  Top 0.025: 16.61,12.53 16.61,13.02
S$269
  Top 0.025: 16.61,12.18 16.61,12.43
S$270
  Top 0.025: 16.59,15.99 16.59,16.42
S$271
  Top 0.025: 16.59,12.53 16.59,12.97
S$272
  Top 0.025: 16.56,16.07 16.56,16.42
S$273
  Top 0.025: 16.56,12.53 16.56,12.92
S$274
  Top 0.025: 16.54,16.09 16.54,16.42
S$275
  Top 0.025: 16.54,12.53 16.54,12.87
S$276
  Top 0.025: 16.51,16.17 16.51,16.42
S$277
  Top 0.025: 16.51,12.53 16.51,12.81
S$278
  Top 0.025: 16.48,16.19 16.48,16.42
S$279
  Top 0.025: 16.48,12.53 16.48,12.79
S$280
  Top 0.025: 16.46,16.19 16.46,16.42
S$281
  Top 0.025: 16.46,12.53 16.46,12.76
S$282
  Top 0.025: 16.43,16.19 16.43,16.42
S$283
  Top 0.025: 16.43,12.53 16.43,12.76
S$284
  Top 0.025: 16.41,16.19 16.41,16.42
S$285
  Top 0.025: 16.41,12.53 16.41,12.76
S$286
  Top 0.025: 16.38,16.19 16.38,16.42
S$287
  Top 0.025: 16.38,12.53 16.38,12.79
S$288
  Top 0.025: 16.36,16.17 16.36,16.42
S$289
  Top 0.025: 16.36,12.53 16.36,12.81
S$290
  Top 0.025: 16.33,16.12 16.33,16.42
S$291
  Top 0.025: 16.33,12.53 16.33,12.84
S$292
  Top 0.025: 16.31,16.07 16.31,16.42
S$293
  Top 0.025: 16.31,12.53 16.31,12.92
S$294
  Top 0.025: 16.28,16.01 16.28,16.42
S$295
  Top 0.025: 16.28,12.53 16.28,12.94
S$296
  Top 0.025: 16.26,15.96 16.26,16.42
S$297
  Top 0.025: 16.26,12.53 16.26,13.02
S$298
  Top 0.025: 16.23,15.91 16.23,16.42
S$299
  Top 0.025: 16.23,12.53 16.23,13.04
S$300
  Top 0.025: 16.21,15.86 16.21,16.42
S$301
  Top 0.025: 16.21,12.53 16.21,13.12
S$302
  Top 0.025: 16.18,15.86 16.18,16.42
S$303
  Top 0.025: 16.18,12.53 16.18,13.17
S$304
  Top 0.025: 16.15,15.86 16.15,16.42
S$305
  Top 0.025: 16.15,12.53 16.15,13.22
S$306
  Top 0.025: 16.13,15.86 16.13,16.42
S$307
  Top 0.025: 16.13,12.53 16.13,13.27
S$308
  Top 0.025: 16.1,15.86 16.1,16.42
S$309
  Top 0.025: 16.1,12.56 16.1,13.3
S$310
  Top 0.025: 16.08,15.86 16.08,16.4
S$311
  Top 0.025: 16.08,12.56 16.08,13.37
S$312
  Top 0.025: 16.05,15.86 16.05,16.4
S$313
  Top 0.025: 16.05,12.56 16.05,13.4
S$314
  Top 0.025: 16.03,15.86 16.03,16.37
S$315
  Top 0.025: 16.03,12.59 16.03,13.45
S$316
  Top 0.025: 16,15.86 16,16.37
S$317
  Top 0.025: 16,12.59 16,13.53
S$318
  Top 0.025: 15.98,15.86 15.98,16.34
S$319
  Top 0.025: 15.98,12.61 15.98,13.58
S$320
  Top 0.025: 15.95,15.86 15.95,16.32
S$321
  Top 0.025: 15.95,12.64 15.95,13.63
S$322
  Top 0.025: 15.93,15.86 15.93,16.29
S$323
  Top 0.025: 15.93,12.66 15.93,13.65
S$324
  Top 0.025: 15.9,15.86 15.9,16.27
S$325
  Top 0.025: 15.9,12.69 15.9,13.73
S$326
  Top 0.025: 15.88,15.86 15.88,16.22
S$327
  Top 0.025: 15.88,15.2 15.88,15.25
S$328
  Top 0.025: 15.88,12.74 15.88,13.78
S$329
  Top 0.025: 15.85,15.86 15.85,16.17
S$330
  Top 0.025: 15.85,15.13 15.85,15.25
S$331
  Top 0.025: 15.85,12.79 15.85,13.83
S$332
  Top 0.025: 15.82,15.86 15.82,16.04
S$333
  Top 0.025: 15.82,15.1 15.82,15.25
S$334
  Top 0.025: 15.82,13.42 15.82,13.86
S$335
  Top 0.025: 15.8,15.86 15.8,16.04
S$336
  Top 0.025: 15.8,15.02 15.8,15.25
S$337
  Top 0.025: 15.8,13.47 15.8,13.93
S$338
  Top 0.025: 15.77,15.86 15.77,16.04
S$339
  Top 0.025: 15.77,14.97 15.77,15.25
S$340
  Top 0.025: 15.77,13.53 15.77,13.98
S$341
  Top 0.025: 15.75,15.86 15.75,16.04
S$342
  Top 0.025: 15.75,14.92 15.75,15.25
S$343
  Top 0.025: 15.75,13.58 15.75,14.03
S$344
  Top 0.025: 15.72,15.86 15.72,16.04
S$345
  Top 0.025: 15.72,14.87 15.72,15.25
S$346
  Top 0.025: 15.72,13.63 15.72,14.08
S$347
  Top 0.025: 15.7,15.86 15.7,16.04
S$348
  Top 0.025: 15.7,14.82 15.7,15.25
S$349
  Top 0.025: 15.7,13.68 15.7,14.13
S$350
  Top 0.025: 15.67,15.86 15.67,16.04
S$351
  Top 0.025: 15.67,14.77 15.67,15.25
S$352
  Top 0.025: 15.67,13.73 15.67,14.19
S$353
  Top 0.025: 15.65,15.86 15.65,16.04
S$354
  Top 0.025: 15.65,14.72 15.65,15.25
S$355
  Top 0.025: 15.65,13.78 15.65,14.24
S$356
  Top 0.025: 15.62,15.86 15.62,16.04
S$357
  Top 0.025: 15.62,14.67 15.62,15.25
S$358
  Top 0.025: 15.62,13.83 15.62,14.29
S$359
  Top 0.025: 15.6,15.86 15.6,16.04
S$360
  Top 0.025: 15.6,14.64 15.6,15.25
S$361
  Top 0.025: 15.6,13.88 15.6,14.34
S$362
  Top 0.025: 15.57,15.86 15.57,16.04
S$363
  Top 0.025: 15.57,15.05 15.57,15.25
S$364
  Top 0.025: 15.57,14.57 15.57,15.02
S$365
  Top 0.025: 15.57,13.96 15.57,14.39
S$366
  Top 0.025: 15.55,15.86 15.55,16.04
S$367
  Top 0.025: 15.55,15.05 15.55,15.25
S$368
  Top 0.025: 15.55,14.52 15.55,14.97
S$369
  Top 0.025: 15.55,14.01 15.55,14.44
S$370
  Top 0.025: 15.52,15.86 15.52,16.04
S$371
  Top 0.025: 15.52,15.05 15.52,15.25
S$372
  Top 0.025: 15.52,14.06 15.52,14.92
S$373
  Top 0.025: 15.49,15.05 15.49,16.04
S$374
  Top 0.025: 15.49,14.08 15.49,14.87
S$375
  Top 0.025: 15.47,15.05 15.47,16.04
S$376
  Top 0.025: 15.47,14.16 15.47,14.8
S$377
  Top 0.025: 15.44,15.05 15.44,16.04
S$378
  Top 0.025: 15.44,14.21 15.44,14.77
S$379
  Top 0.025: 15.42,15.05 15.42,16.04
S$380
  Top 0.025: 15.42,14.26 15.42,14.69
S$381
  Top 0.025: 15.39,15.05 15.39,16.04
S$382
  Top 0.025: 15.39,14.31 15.39,14.67
S$383
  Top 0.025: 15.37,15.05 15.37,16.04
S$384
  Top 0.025: 15.37,14.36 15.37,14.59
S$385
  Top 0.025: 15.34,15.05 15.34,16.04
S$386
  Top 0.025: 15.34,14.44 15.34,14.54
S$387
  pour Top (no thermals): 36.7,41.88 37.26,41.88 37.26,45.54 36.7,45.54
TX_LED  (via drill 0.5 pad 1)  (1 unrouted)
  Top 0.2: v13.92,25.1 13.98,25.16 32U4.22 | 10.67,41.19 10.67,40.18 v10.54,40.31
  Bottom 0.2: v10.54,40.31 10.54,32.77 13.94,29.36 13.94,25.12 v13.92,25.1
UEXT_POWER
  Top 0.3: UEXT.1 6.43,25.48 7.07,24.83 8.2,24.83
V_BATT  (via drill 0.71 pad 1.27)  (2 unrouted)
  Bottom 0.3: 25.06,19.64 27.3,19.64 | 16.92,54.56 16.92,54.25 17.78,53.39 U1.3 19.04,51.65 19.42,51.26 20.32,51.26
  Bottom 0.5: JP1.2 9.17,46.69 11.66,44.2 11.66,32.49 14.99,29.16 14.99,24.76 20.12,19.63 25.68,19.63
  other vias: 9.17,47.4 9.17,48.97 9.17,50.55
  pour Top (no thermals): 8.18,46.58 11.33,46.58 11.33,50.7 8.18,50.7
  pour Top (no thermals): 6.15,50.7 11.33,50.7 11.33,52.53 6.15,52.53
  pour Top (no thermals): 0.46,50.7 6.45,50.7 6.45,57.05 0.46,57.05
  pour Bottom (no thermals): 17.53,51.05 21.44,51.05 21.44,54.86 17.53,54.86
  pour Bottom (no thermals): 17.68,52.73 19.38,52.73 19.38,54.66 17.68,54.66
  pour Bottom (no thermals): 8.66,54.23 18.85,54.23 18.85,55.73 8.66,55.73
  pour Bottom (no thermals): 8.66,53.87 21.16,53.87 21.16,54.76 8.66,54.76

## Text on the board
Top: 2015 | Battery Oprated Board
tPlace: TX | RX